# Altium PCB MainBoard.PcbDoc (part 1 of 2)
Units mm, origin at the board's own origin, x right, y up, seen from the top; angles counter-clockwise.
Board outline 48.44 x 52.94 mm, 4 copper layers (Component Side, Ground Plane, Power Plane, Solder Side), stack 0.844 mm thick; 73 components, 157 nets, 521 pads, 251 vias.
Unrouted connection lines stored in the file: 2.
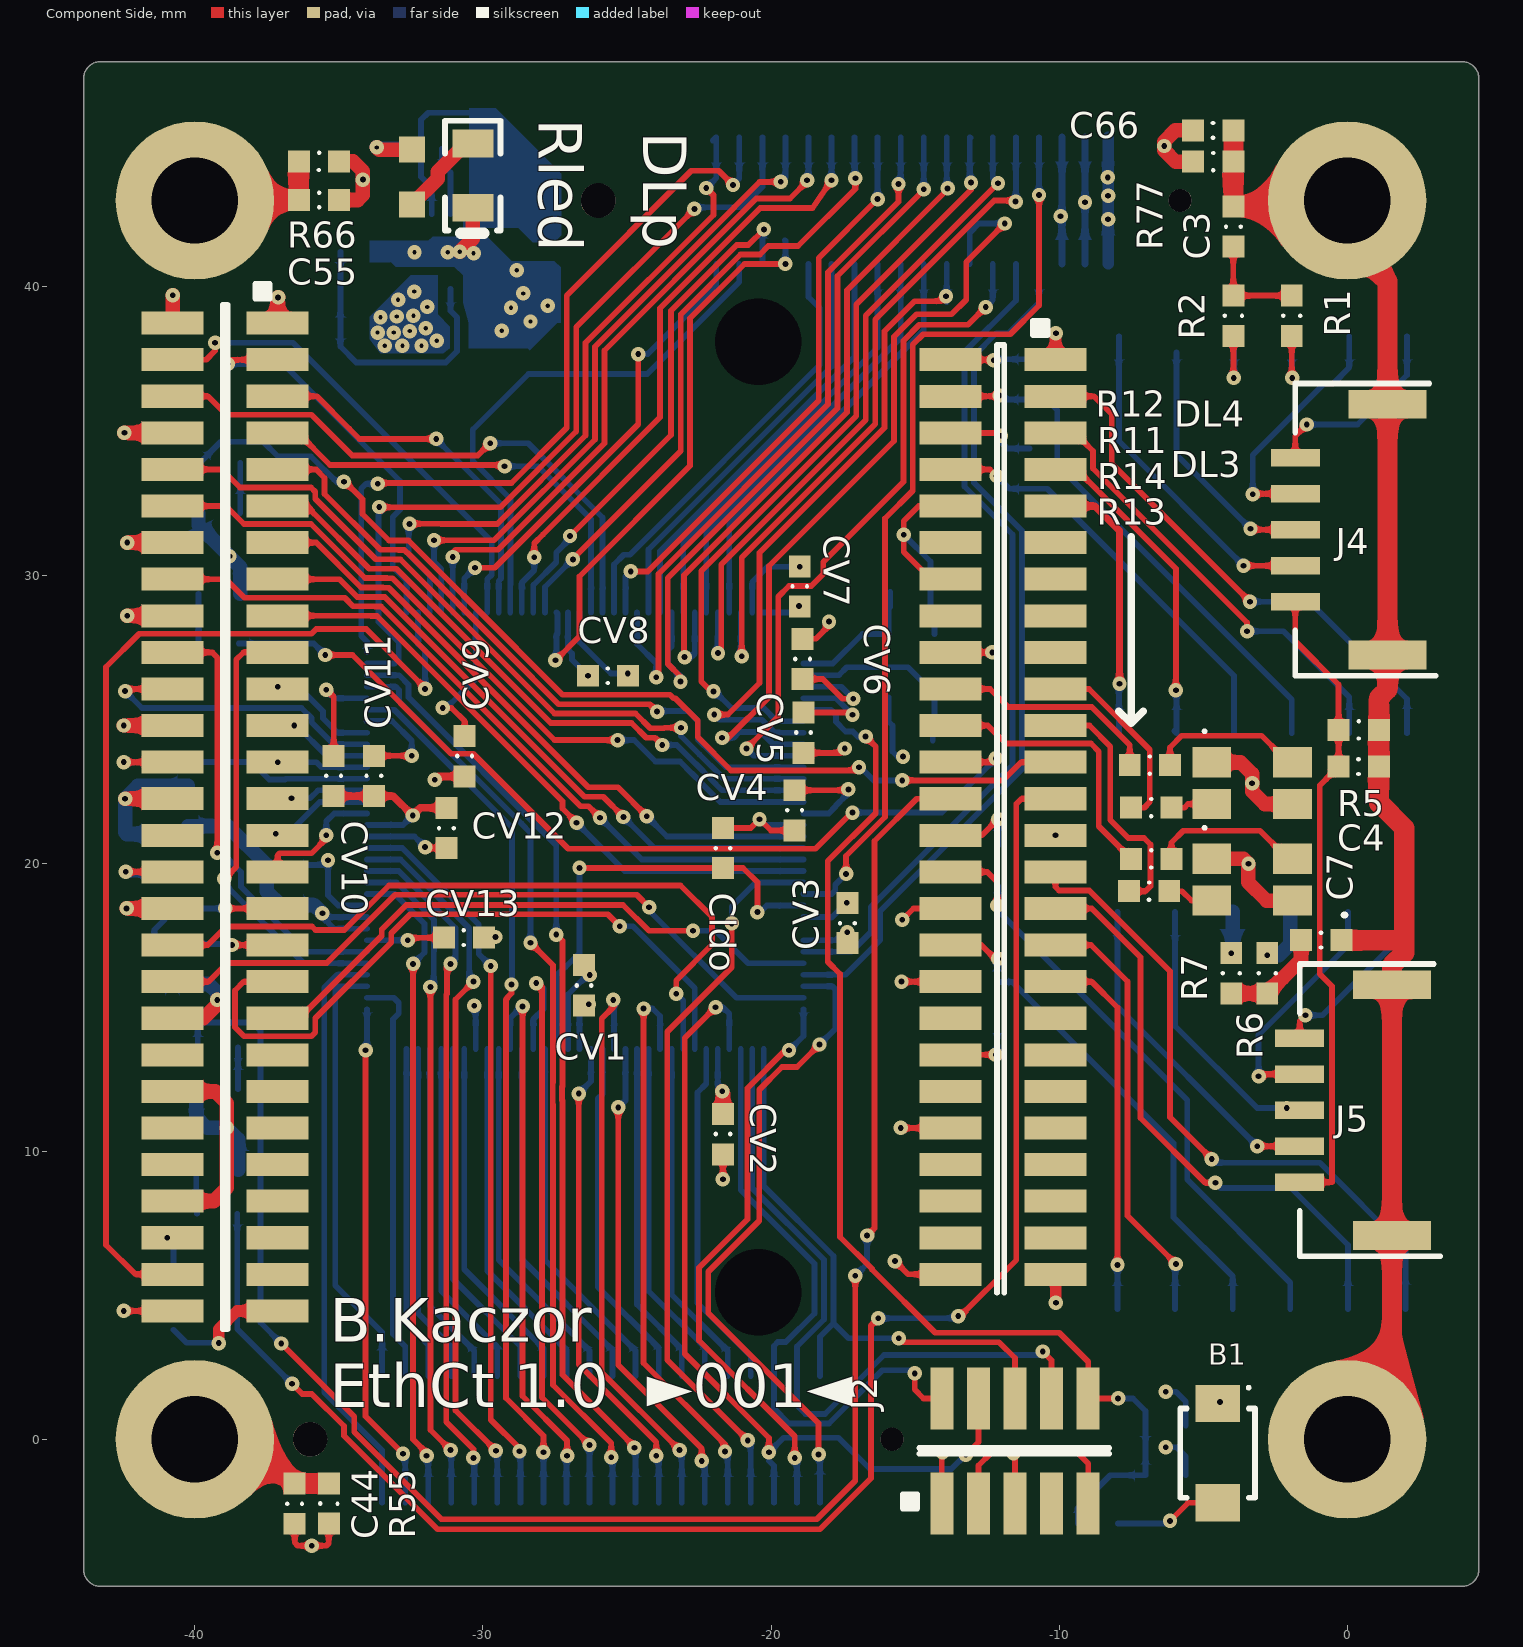
[diagram p0: Component Side view]
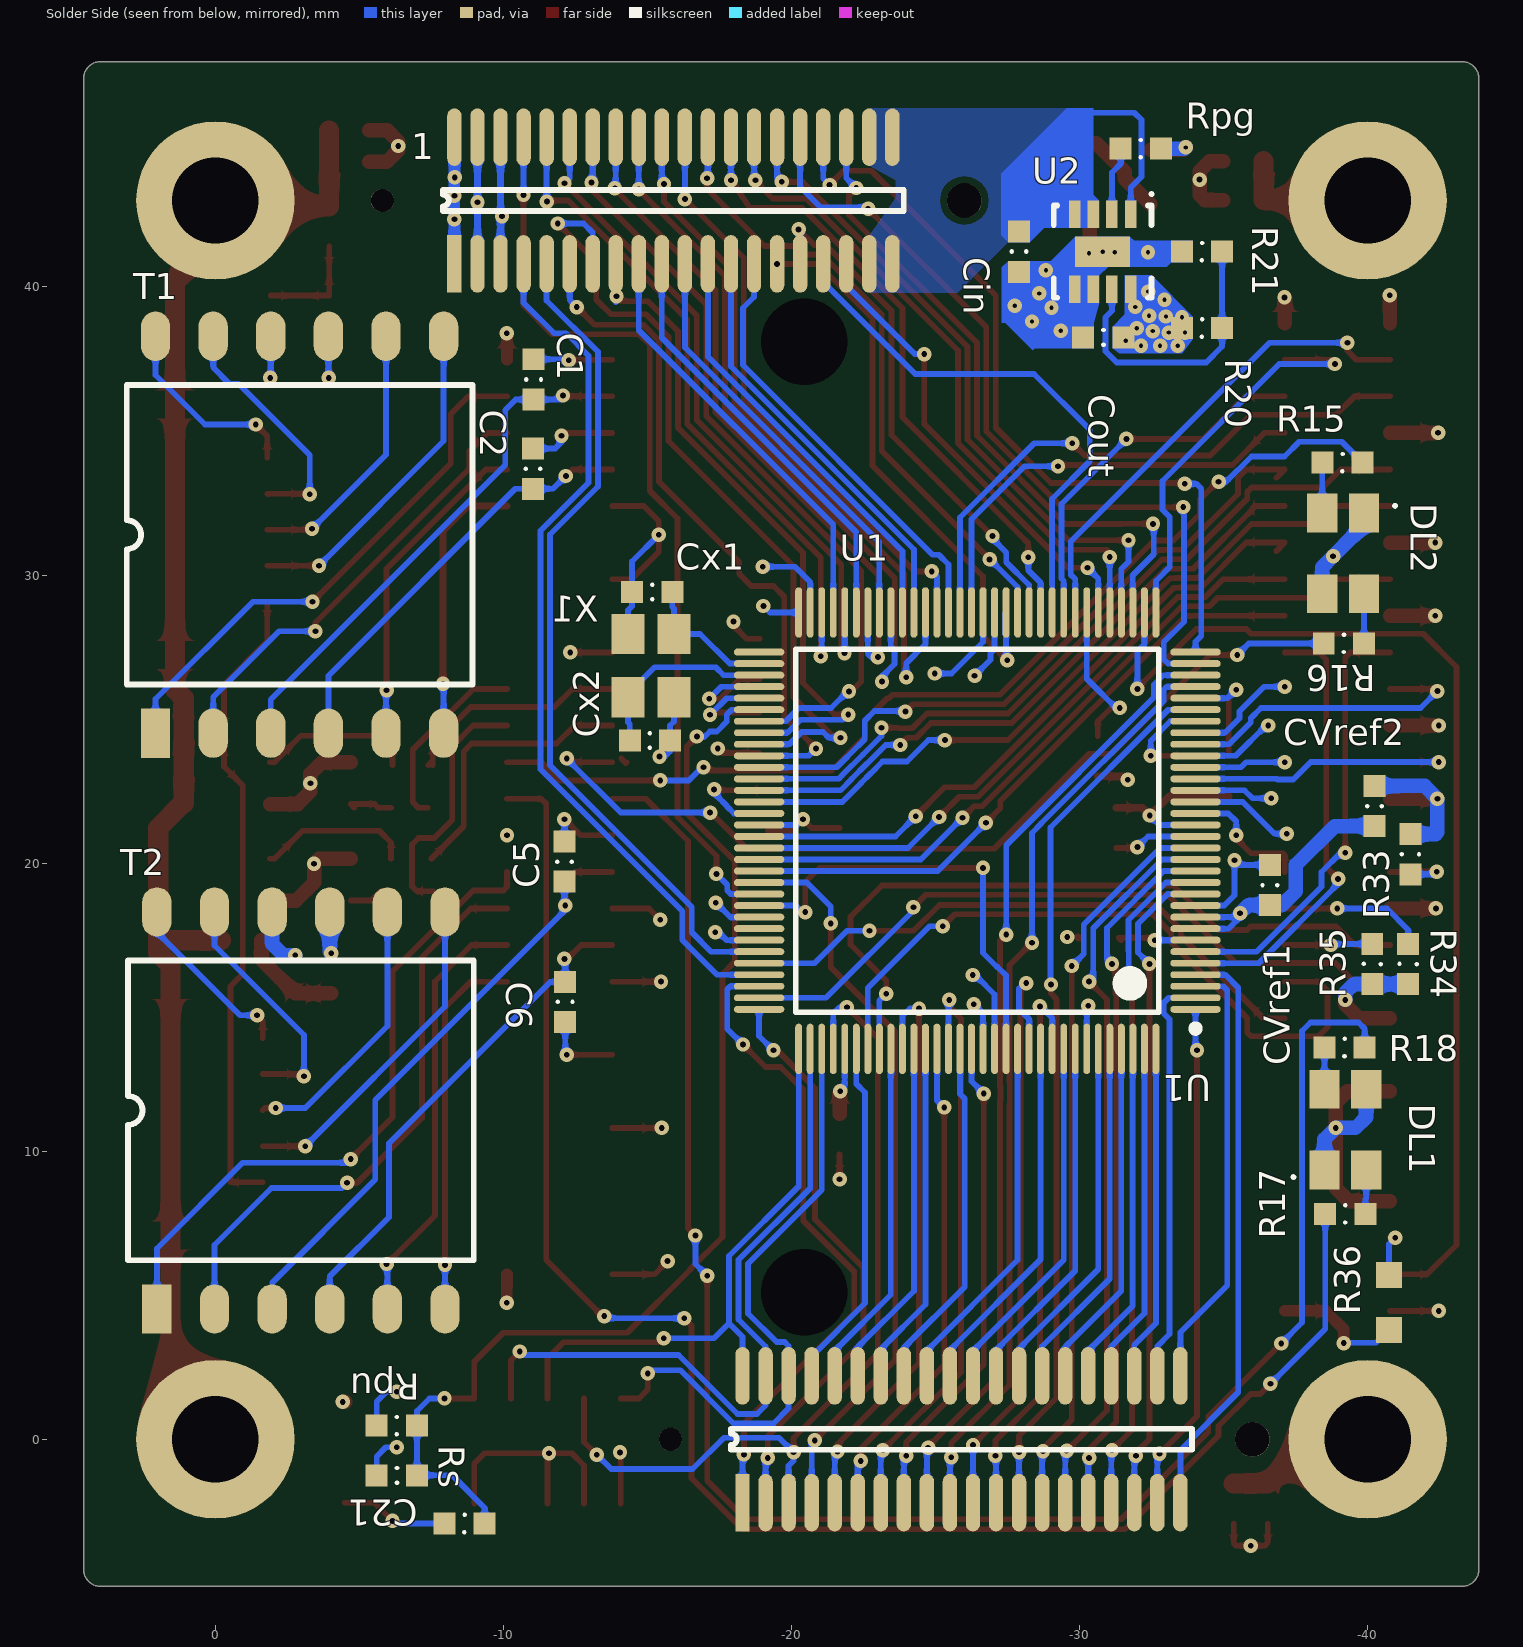
[diagram p1: Solder Side view, seen from below]
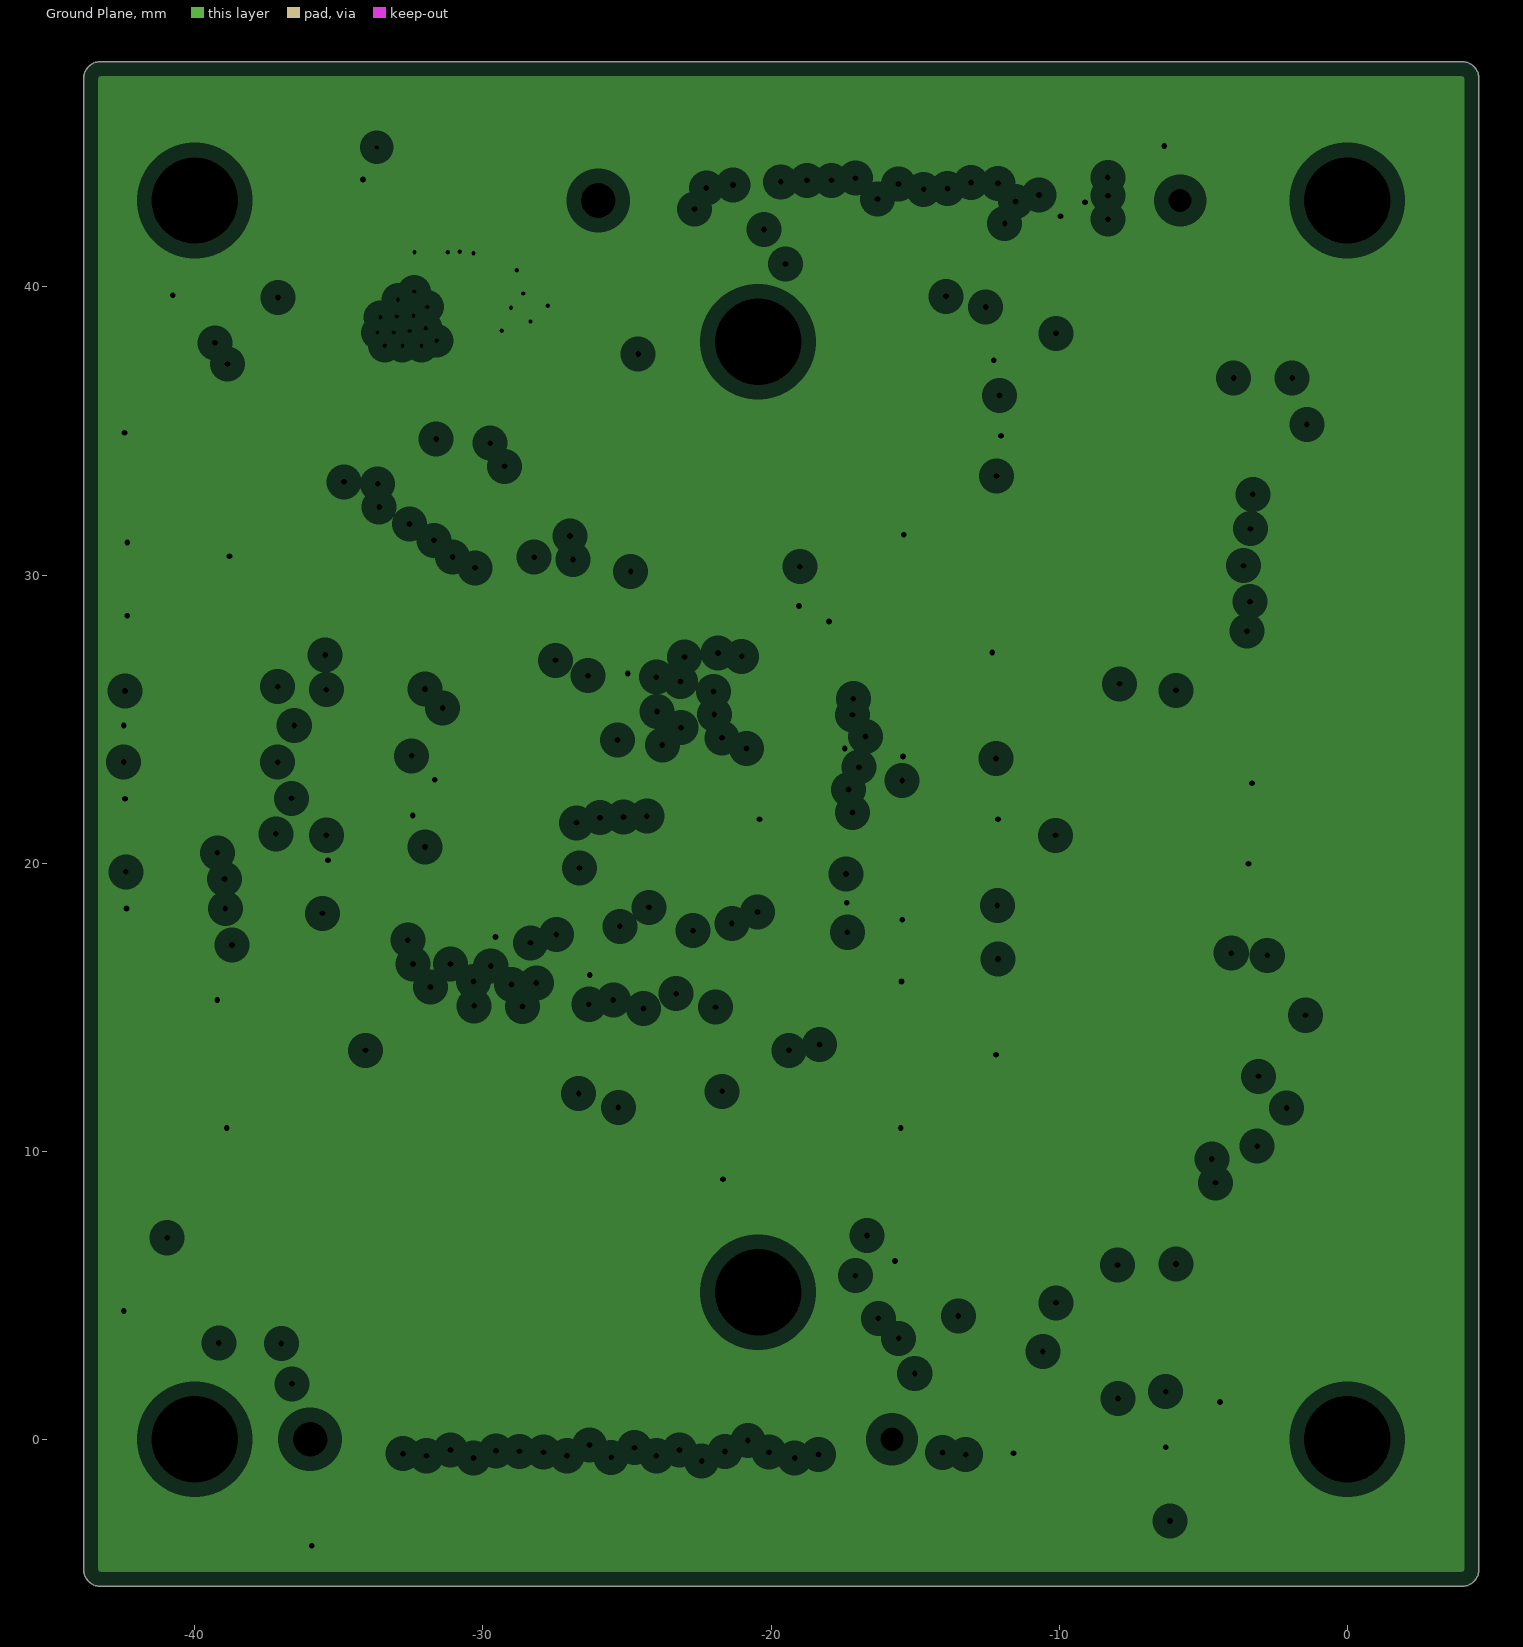
[diagram p2: Ground Plane, clearances drawn from the general rule]
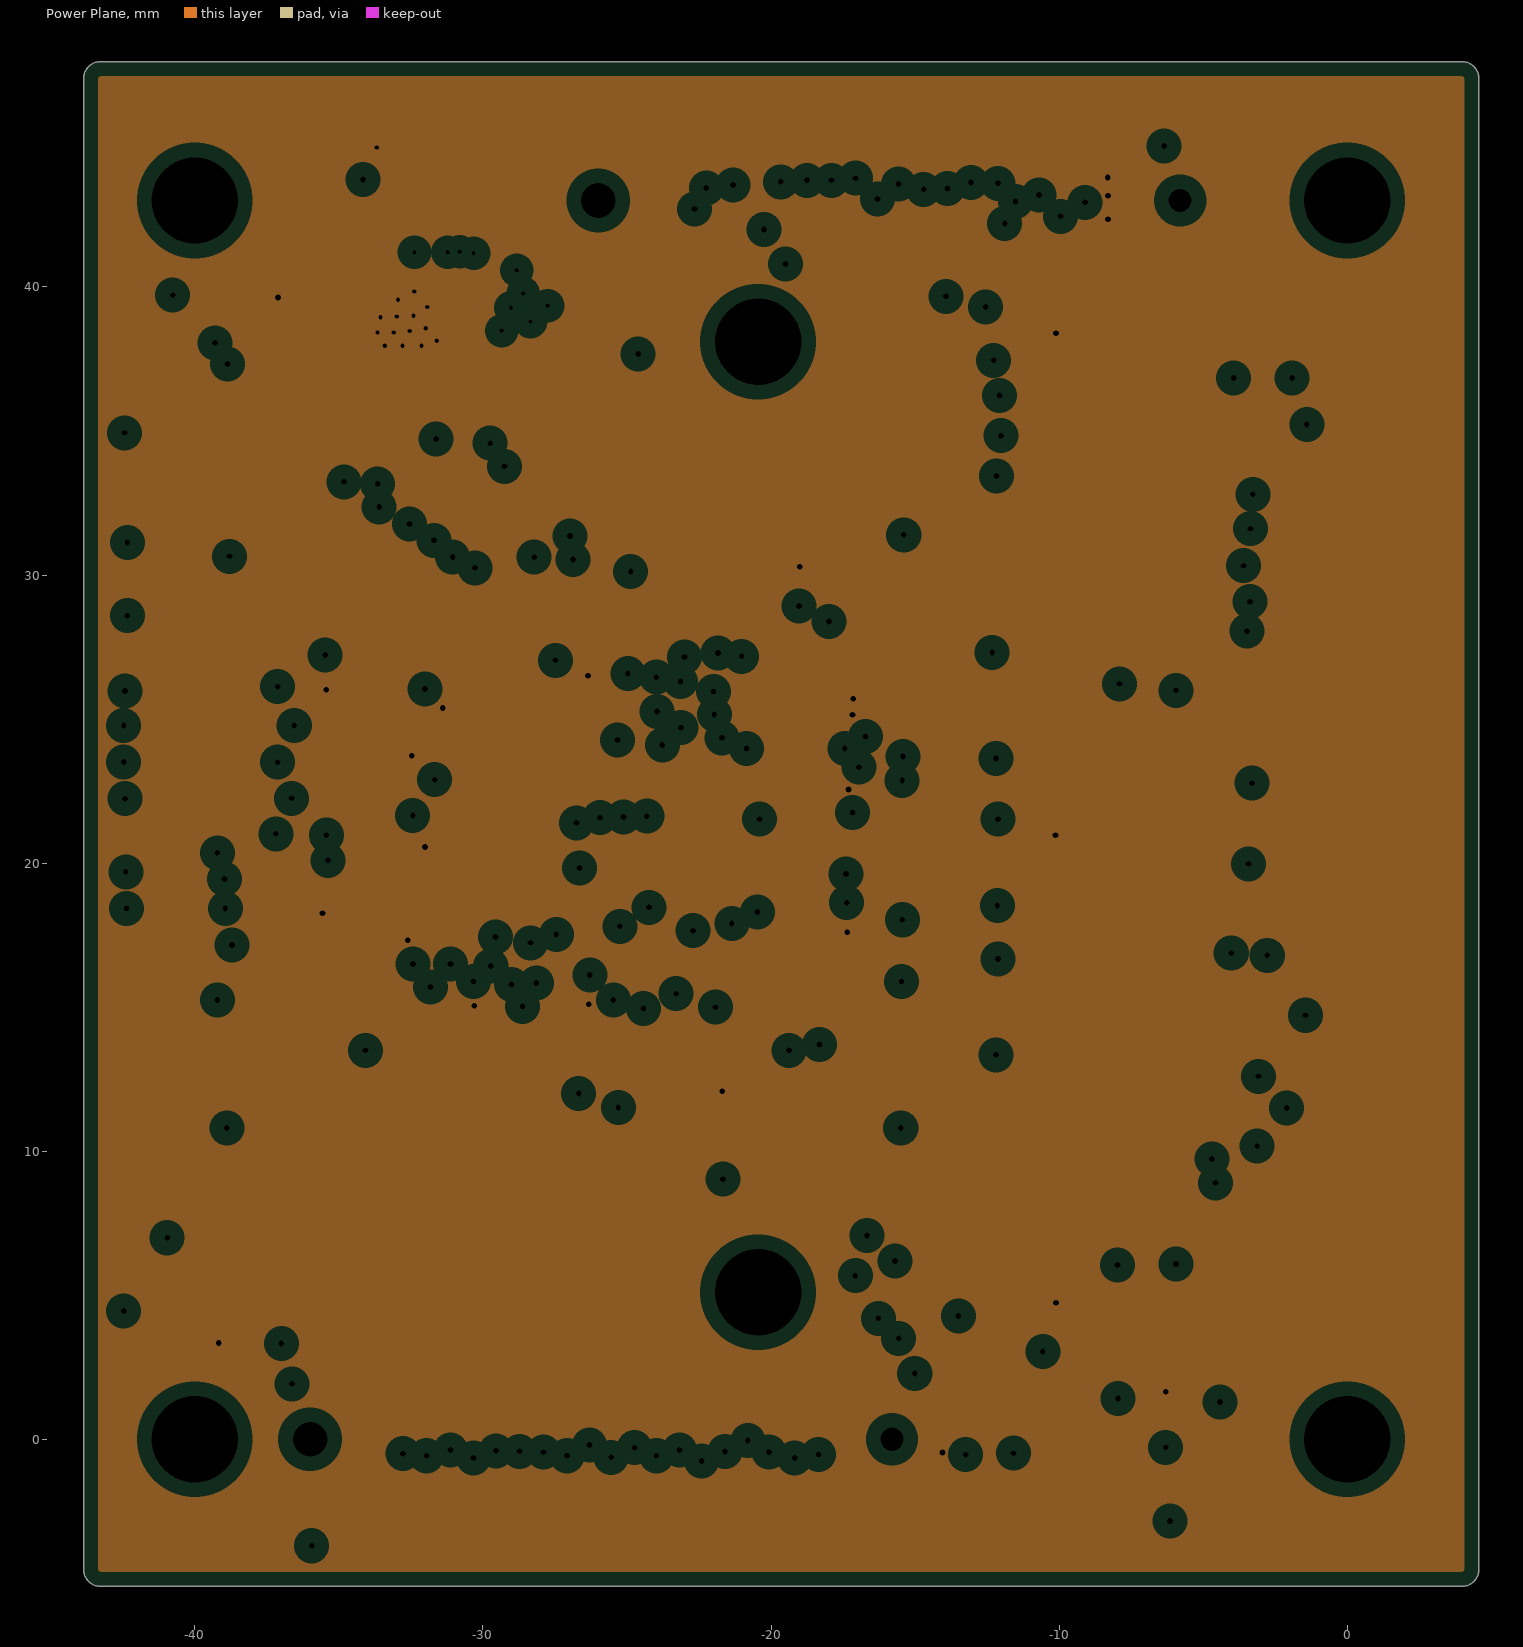
[diagram p3: Power Plane, clearances drawn from the general rule]

## Layer stack, top to bottom
Top Solder: solder mask 0.0102, Solder Resist, Dk 3.5
Component Side: signal copper 0.0356
Dielectric 1: core 0.32, FR-4, Dk 4.8
Ground Plane: plane copper 0.036, net GND
Dielectric 3: prepreg 0.127, Dk 4.2
Power Plane: plane copper 0.036, net 3V3
Dielectric 4: core 0.254, Dk 4.2
Solder Side: signal copper 0.0356
Bottom Solder: solder mask 0.0102, Solder Resist, Dk 3.5

## Board outline
-43.265,-5.11 cw(c-43.265,-4.51) -43.865,-4.51 -43.865,47.225 cw(c-43.265,47.225) -43.265,47.825 3.975,47.825 cw(c3.975,47.225) 4.575,47.225 4.575,-4.51 cw(c3.975,-4.51) 3.975,-5.11

## Design rules (kind name [scope] priority, off if disabled: settings)
BoardOutlineClearance [All] p1: gap=0.254
Clearance [All] p1: gap=0.127 except(0.229: Track-Via SMDPad-Via THPad-Via THPad-Fill THPad-Poly THPad-Region Via-Fill Via-Poly Via-Region; 0.254: Arc-Text Track-Text SMDPad-Text THPad-Text Via-Text Fill-Text Poly-Text Region-Text Text-Text; 0.305: THPad-THPad Via-Via)
HoleSize [All] p1: absolutevalues=TRUE maxlimit=5 minlimit=0.025 maxpercent=80.000 minpercent=20.000
MinimumSolderMaskSliver [All] p1: minsoldermaskwidth=0.076
PlaneClearance [All] p1: clearance=0.508
PlaneConnect [All] p1: planeconnectstyle=Direct reliefexpansion=0.508 reliefentries=4 reliefconductorwidth=0.254 reliefairgap=0.254
PolygonConnect [All] p1: connectstyle=Direct reliefconductorwidth=0.254 reliefentries=4 polygonreliefangle="90 Angle" airgapwidth=0.254
RoutingVias [All] p1: holewidth=0.2 width=0.5 viastyle="Through Hole" minholewidth=0.15 minwidth=0 maxholewidth=20 maxwidth=222
SMDEntry [All] p1: side=TRUE corner=TRUE anyangle=FALSE
SilkToBoardRegionClearance SilkToBoardRegionClearance_1 [All] p1:
SilkToSilkClearance [All] p1: silktosilkclearance=0.102
SilkToSolderMaskClearance [IsPad] p1: minsilkscreentomaskgap=0.102 clearancetoexposedcopper=TRUE
SolderMaskExpansion [Isvia] p1: expansion=0.07 soldermaskfromhole=TRUE
SolderMaskExpansion SolderMaskExpansionuSip8 [HasFootprint('uSIP-8')] p2: expansion=0.152
SolderMaskExpansion SolderMaskExpansion_1 [All] p3: expansion=0.102
Width [All] p1: maxlimit=1.27 minlimit=0.127 preferedwidth=0.254
23 further rules are at their usual default settings.

## Classes and differential pairs
component class Anybus-Base: R33 R34 R35 R36 U1
component class Connectors: 1 J2
component class Network: C1 C2 C3 C4 C5 C6 C7 DL1 DL2 DL3 DL4 J4 J5 R1 R2 R5 R6 R7 R11 R12 R13 R14 R15 R16 R17 R18 T1 T2 ""
component class PowerSupply: B1 C21 C44 C55 C66 Cin Cldo Cout CV1 CV2 CV3 CV4 CV5 CV6 CV7 CV8 CV9 CV10 CV11 CV12 CV13 CVref1 CVref2 Cx1 Cx2 DLp R20 R21 R55 R66 R77 Rled Rpg Rpu Rs U2 X1

## Components (designator, comment, footprint, x,y, rotation, side; value= is the part's Value field where it differs from the comment)
1 "TE-Fine-Stack-40-S_eth" TE-FINE-STACK-40-S-ETH -36,0 r90 bottom
B1 "B_TACTD37" _B_TACT30 -4.496,-0.483 r270 top
C1 "100n" "0603 HighDensity" -11.052,36.791 r90 bottom
C2 "100n" "0603 HighDensity" -11.027,33.692 r90 bottom
C3 "1n" "0603 HighDensity" -3.951,42.1 r90 top
C4 "1n" "0603 HighDensity" 0.4,23.35 r0 top
C5 "100n" "0603 HighDensity" -12.119,20.053 r90 bottom
C6 "100n" "0603 HighDensity" -12.144,15.176 r270 bottom
C7 "1n" "0603 HighDensity" -0.9,17.325 r0 top
C21 "10n" "0603 HighDensity" -6.3,-1.25 r0 bottom
C44 "1n" "0603 HighDensity" -36.535,-2.233 r90 top
C55 "1n" "0603 HighDensity" -35.692,43.015 r180 top
C66 "1n" "0603 HighDensity" -4.65,45.436 r0 top
Cin "10n" "0603 HighDensity" -27.9,41.225 r270 bottom
Cldo "10n" "0603 HighDensity" -21.666,20.523 r90 top
Cout "22u" "0603 HighDensity" -30.825,38.25 r0 bottom
CV1 "100n" "0603 HighDensity" -26.495,15.76 r90 top
CV2 "100n" "0603 HighDensity" -21.669,10.591 r270 top
CV3 "100n" "0603 HighDensity" -17.351,17.919 r90 top
CV4 "100n" "0603 HighDensity" -19.18,21.831 r270 top
CV5 "100n" "0603 HighDensity" -18.875,24.525 r270 top
CV6 "100n" "0603 HighDensity" -18.901,27.088 r90 top
CV7 "100n" "0603 HighDensity" -19.002,29.603 r270 top
CV8 "100n" "0603 HighDensity" -25.657,26.504 r0 top
CV9 "100n" "0603 HighDensity" -30.635,23.71 r270 top
CV10 "100n" "0603 HighDensity" -35.182,23.024 r270 top
CV11 "100n" "0603 HighDensity" -33.785,23.024 r270 top
CV12 "100n" "0603 HighDensity" -31.27,21.221 r90 top
CV13 "100n" "0603 HighDensity" -30.661,17.411 r0 top
CVref1 "100n" "0603 HighDensity" -36.604,19.24 r90 bottom
CVref2 "100n" "0603 HighDensity" -40.237,21.983 r90 bottom
Cx1 "100n" "0603 HighDensity" -15.088,24.257 r180 bottom
Cx2 "100n" "0603 HighDensity" -15.164,29.413 r0 bottom
DL1 "LED2" "2D-  3528, PLCC4" -39.225,10.751 r90 bottom
DL2 "LED2" "2D-  3528, PLCC4" -39.15,30.75 r270 bottom
DL3 "LED2" "2D-  3528, PLCC4" -3.3,19.425 r0 top
DL4 "LED2" "2D-  3528, PLCC4" -3.3,22.775 r0 top
DLp "RED" 0805_LED -30.353,43.866 r90 top
J2 "Pin 2.00mm" "GOLDPIN 1.27MM SOCKET 2X5 SMD" -11.532,-0.406 r90 top
J4 "Click_Mate 5x1" "CLIK-Mate 5x1" -1.8,29.075 r270 top
J5 "Click_Mate 5x1" "CLIK-Mate 5x1" -1.648,8.925 r270 top
R1 "75" "0603_R HighDensity" -1.925,39 r270 top
R2 "75" "0603_R HighDensity" -3.95,39 r270 top
R5 "1M" "0603_R HighDensity" 0.4,24.625 r180 top
R6 "75" "0603_R HighDensity" -2.775,16.175 r90 top
R7 "75" "0603_R HighDensity" -4.025,16.175 r90 top
R11 "220" "0603_R HIGHDENSITY" -6.8,21.925 r180 top
R12 "220" "0603_R HIGHDENSITY" -6.85,23.4 r180 top
R13 "220" "0603_R HIGHDENSITY" -6.875,19.025 r180 top
R14 "220" "0603_R HIGHDENSITY" -6.8,20.15 r180 top
R15 "220" "0603_R HIGHDENSITY" -39.125,33.9 r180 bottom
R16 "220" "0603_R HIGHDENSITY" -39.175,27.625 r0 bottom
R17 "220" "0603_R HIGHDENSITY" -39.225,7.825 r0 bottom
R18 "220" "0603_R HIGHDENSITY" -39.2,13.6 r180 bottom
R20 "510k" "0603_R HighDensity" -34.25,38.575 r0 bottom
R21 "162k" "0603_R HighDensity" -34.25,41.225 r180 bottom
R33 "10k" "0603_R HighDensity" -41.481,20.307 r270 bottom
R34 "10k" "0603_R HighDensity" -41.405,16.497 r90 bottom
R35 "10k" "0603_R HighDensity" -40.16,16.497 r90 bottom
R36 "10k" RES0603_M -40.742,4.75 r270 bottom
R55 "500k" "0603_R HighDensity" -35.35,-2.233 r270 top
R66 "500k" "0603_R HighDensity" -35.692,44.36 r0 top
R77 "500k" "0603_R HighDensity" -4.65,44.35 r180 top
Rled "100" RES0603_M -32.461,43.815 r90 top
Rpg "499k" "0603_R HighDensity" -32.125,44.8 r180 bottom
Rpu "10k" "0603_R HighDensity" -6.3,0.475 r0 bottom
Rs "470" "0603_R HighDensity" -8.65,-2.925 r180 bottom
T1 "47uH" H1112 2.075,24.509 r90 bottom
T2 "47uH" H1112 2.027,4.525 r90 bottom
U1 "TM4C1292NCPDTI3R" PDT0128A_N -26.45,21.125 r0 bottom
U2 "TPS82085" uSIP-8 -30.8,41.225 r270 bottom
X1 "25MHz" _X_CFPX180 -14.326,25.756 r90 bottom
? "Anybus_CC_B40" Anybus-CC-B40 -25.45,21.6 r0 top

## Footprints (in the part's own frame and the unit in brackets; to place one, negate y for a bottom-side part, rotate by r counter-clockwise, add the part's x,y. Pads: shape width x height; smd on the part's side, far side on the other; paste and mask are expansions set on the pad)
"2D-  3528, PLCC4" [mm] "DFN, 4-Leads, Body 2,80x3,25mm, Pitch 2,80mm, IPC Medium Density"
  rect 1.35x1.05 smd: 1(-1.4,0.725) 2(-1.4,-0.725) 3(1.4,-0.725) 4(1.4,0.725)
  silkscreen extent -1.7,1.75 -1.6,1.85, body extent -1.65,-1.4 1.65,1.4, height 1.9
"0603 HighDensity" [mil]
  rect 30x30 smd: 1(-27.5,0) 2(27.5,0)
  silkscreen extent -1,-10 0,10, body extent -31,-16 31,16, height 31
"0603_R HighDensity" [mil]
  rect 30x30 smd: 1(-27.5,0) 2(27.5,0)
  silkscreen extent 0,-12 0,12, body extent -31,-16 31,16, height 31
"0603_R HIGHDENSITY" [mil]
  rect 30x30 smd: 1(-27.5,0) 2(27.5,0)
  silkscreen extent 0,-12 0,12, body extent -31,-16 31,16, height 31
0805_LED [mm]
  rect 0.965x1.422 smd: A(1.118,0) K(-1.118,0)
  silkscreen extent -2,-0.97 1.91,0.97, body extent -1,-0.63 1,0.63, height 0.9
_B_TACT30 [mm] "Tactile switch 1.2x3x2.5mm"
  rect 1.3x1.55 smd: 1(-1.725,0) 2(1.725,0)
  silkscreen extent -2.32,-1.3 1.55,1.3, body extent -1.55,-1.3 1.55,1.3, height 1.75
_X_CFPX180 [mm] "XTAL Q0M032D7-TXC Maritex"
  rect 1.4x1.15 smd: 1(0,0) 2(2.2,0) 3(2.2,-1.6) 4(0,-1.6)
Anybus-CC-B40 [mm]
  round 1.524 hole 3 unplated: 1(5,-16.5) 1(5,16.5)
  rect 2.15x0.8 smd: 1(15.325,15.874) 2(11.675,15.874) 3(15.325,14.604) 4(11.675,14.604) 5(15.325,13.334) 6(11.675,13.334) 7(15.325,12.064) 8(11.675,12.064) 9(15.325,10.794) 10(11.675,10.794) 11(15.325,9.524) 12(11.675,9.524) 13(15.325,8.254) 14(11.675,8.254) 15(15.325,6.984) 16(11.675,6.984) 17(15.325,5.714) 18(11.675,5.714) 19(15.325,4.444) 20(11.675,4.444) 21(15.325,3.174) 22(11.675,3.174) 23(15.325,1.904) 24(11.675,1.904) 25(15.325,0.634) 26(11.675,0.634) 27(15.325,-0.636) 28(11.675,-0.636) 29(15.325,-1.906) 30(11.675,-1.906) 31(15.325,-3.176) 32(11.675,-3.176) 33(15.325,-4.446) 34(11.675,-4.446) 35(15.325,-5.716) 36(11.675,-5.716) 37(15.325,-6.986) 38(11.675,-6.986) 39(15.325,-8.256) 40(11.675,-8.256) 41(15.325,-9.526) 42(11.675,-9.526) 43(15.325,-10.796) 44(11.675,-10.796) 45(15.325,-12.066) 46(11.675,-12.066) 47(15.325,-13.336) 48(11.675,-13.336) 49(15.325,-14.606) 50(11.675,-14.606) 51(15.325,-15.876) 52(11.675,-15.876) 101(-11.675,17.145) 102(-15.325,17.145) 103(-11.675,15.875) 104(-15.325,15.875) 105(-11.675,14.605) 106(-15.325,14.605) 107(-11.675,13.335) 108(-15.325,13.335) 109(-11.675,12.065) 110(-15.325,12.065) 111(-11.675,10.795) 112(-15.325,10.795) 113(-11.675,9.525) 114(-15.325,9.525) 115(-11.675,8.255) 116(-15.325,8.255) 117(-11.675,6.985) 118(-15.325,6.985) 119(-11.675,5.715) 120(-15.325,5.715) 121(-11.675,4.445) 122(-15.325,4.445) 123(-11.675,3.175) 124(-15.325,3.175) 125(-11.675,1.905) 126(-15.325,1.905) 127(-11.675,0.635) 128(-15.325,0.635) 129(-11.675,-0.635) 130(-15.325,-0.635) 131(-11.675,-1.905) 132(-15.325,-1.905) 133(-11.675,-3.175) 134(-15.325,-3.175) 135(-11.675,-4.445) 136(-15.325,-4.445) 137(-11.675,-5.715) 138(-15.325,-5.715) 139(-11.675,-6.985) 140(-15.325,-6.985) 141(-11.675,-8.255) 142(-15.325,-8.255) 143(-11.675,-9.525) 144(-15.325,-9.525) 145(-11.675,-10.795) 146(-15.325,-10.795) 147(-11.675,-12.065) 148(-15.325,-12.065) 149(-11.675,-13.335) 150(-15.325,-13.335) 151(-11.675,-14.605) 152(-15.325,-14.605) 153(-11.675,-15.875) 154(-15.325,-15.875) 155(-11.675,-17.145) 156(-15.325,-17.145)
  silkscreen extent -13.58,-17.78 15.05,18.5, body extent -15.05,-17.3 15.05,17.3, height 4.4
"CLIK-Mate 5x1" [mm]
  rect 0.6x1.7 smd: 0(-5,0) 1(-3.75,0) 2(-2.5,0) 3(-1.25,0) 4(0,0)
  rect 1x2.7 smd: 5(-6.85,3.2) 6(1.85,3.2)
  silkscreen extent -7.57,0 2.58,4.87, body extent -7.28,-0.65 2.32,4.35, height 5.53
"GOLDPIN 1.27MM SOCKET 2X5 SMD" [mm]
  rect 2.15x0.8 smd: 1(-1.825,2.54) 2(-1.825,1.27) 3(-1.825,0) 4(-1.825,-1.27) 5(-1.825,-2.54) 6(1.825,-2.54) 7(1.825,-1.27) 8(1.825,0) 9(1.825,1.27) 10(1.825,2.54)
  silkscreen extent -2,-3.28 0.1,3.9, body extent -1.55,-2.68 1.55,2.7, height 4.4
H1112 [mm]
  rect 1.71x1.02 smd: 1(0,0)
  oval 1.71x1.02 smd: 2(0,-2) 3(0,-4) 4(0,-6) 5(0,-8) 6(0,-10) 7(13.78,-10) 8(13.78,-8) 9(13.78,-6) 10(13.78,-4) 11(13.78,-2) 12(13.78,0)
  silkscreen extent 1.69,-11 12.09,1, body extent 0.4,-11 13.4,1, height 4.88
PDT0128A_N [mm]
  oval 1.75x0.24 smd paste-0.102 mask+0.102: 1(-7.575,6.2) 2(-7.575,5.8) 3(-7.575,5.4) 4(-7.575,5) 5(-7.575,4.6) 6(-7.575,4.2) 7(-7.575,3.8) 8(-7.575,3.4) 9(-7.575,3) 10(-7.575,2.6) 11(-7.575,2.2) 12(-7.575,1.8) 13(-7.575,1.4) 14(-7.575,1) 15(-7.575,0.6) 16(-7.575,0.2) 17(-7.575,-0.2) 18(-7.575,-0.6) 19(-7.575,-1) 20(-7.575,-1.4) 21(-7.575,-1.8) 22(-7.575,-2.2) 23(-7.575,-2.6) 24(-7.575,-3) 25(-7.575,-3.4) 26(-7.575,-3.8) 27(-7.575,-4.2) 28(-7.575,-4.6) 29(-7.575,-5) 30(-7.575,-5.4) 31(-7.575,-5.8) 32(-7.575,-6.2) 65(7.575,-6.2) 66(7.575,-5.8) 67(7.575,-5.4) 68(7.575,-5) 69(7.575,-4.6) 70(7.575,-4.2) 71(7.575,-3.8) 72(7.575,-3.4) 73(7.575,-3) 74(7.575,-2.6) 75(7.575,-2.2) 76(7.575,-1.8) 77(7.575,-1.4) 78(7.575,-1) 79(7.575,-0.6) 80(7.575,-0.2) 81(7.575,0.2) 82(7.575,0.6) 83(7.575,1) 84(7.575,1.4) 85(7.575,1.8) 86(7.575,2.2) 87(7.575,2.6) 88(7.575,3) 89(7.575,3.4) 90(7.575,3.8) 91(7.575,4.2) 92(7.575,4.6) 93(7.575,5) 94(7.575,5.4) 95(7.575,5.8) 96(7.575,6.2)
  oval 0.24x1.75 smd paste-0.102 mask+0.102: 33(-6.2,-7.575) 34(-5.8,-7.575) 35(-5.4,-7.575) 36(-5,-7.575) 37(-4.6,-7.575) 38(-4.2,-7.575) 39(-3.8,-7.575) 40(-3.4,-7.575) 41(-3,-7.575) 42(-2.6,-7.575) 43(-2.2,-7.575) 44(-1.8,-7.575) 45(-1.4,-7.575) 46(-1,-7.575) 47(-0.6,-7.575) 48(-0.2,-7.575) 49(0.2,-7.575) 50(0.6,-7.575) 51(1,-7.575) 52(1.4,-7.575) 53(1.8,-7.575) 54(2.2,-7.575) 55(2.6,-7.575) 56(3,-7.575) 57(3.4,-7.575) 58(3.8,-7.575) 59(4.2,-7.575) 60(4.6,-7.575) 61(5,-7.575) 62(5.4,-7.575) 63(5.8,-7.575) 64(6.2,-7.575) 97(6.2,7.575) 98(5.8,7.575) 99(5.4,7.575) 100(5,7.575) 101(4.6,7.575) 102(4.2,7.575) 103(3.8,7.575) 104(3.4,7.575) 105(3,7.575) 106(2.6,7.575) 107(2.2,7.575) 108(1.8,7.575) 109(1.4,7.575) 110(1,7.575) 111(0.6,7.575) 112(0.2,7.575) 113(-0.2,7.575) 114(-0.6,7.575) 115(-1,7.575) 116(-1.4,7.575) 117(-1.8,7.575) 118(-2.2,7.575) 119(-2.6,7.575) 120(-3,7.575) 121(-3.4,7.575) 122(-3.8,7.575) 123(-4.2,7.575) 124(-4.6,7.575) 125(-5,7.575) 126(-5.4,7.575) 127(-5.8,7.575) 128(-6.2,7.575)
  silkscreen extent -7.7,-6.3 6.3,6.99
RES0603_M [mm]
  rect 0.9x0.9 smd: 1(-0.95,0) 2(0.95,0)
  body extent -0.82,-0.48 0.82,0.48, height 0.5
TE-FINE-STACK-40-S-ETH [mm]
  rect 2x0.5 smd: 1(-2.2,17.7) 41(40.8,27.7)
  oval 2x0.5 smd: 2(-2.2,16.9) 3(-2.2,16.1) 4(-2.2,15.3) 5(-2.2,14.5) 6(-2.2,13.7) 7(-2.2,12.9) 8(-2.2,12.1) 9(-2.2,11.3) 10(-2.2,10.5) 11(-2.2,9.7) 12(-2.2,8.9) 13(-2.2,8.1) 14(-2.2,7.3) 15(-2.2,6.5) 16(-2.2,5.7) 17(-2.2,4.9) 18(-2.2,4.1) 19(-2.2,3.3) 20(-2.2,2.5) 21(2.2,2.5) 22(2.2,3.3) 23(2.2,4.1) 24(2.2,4.9) 25(2.2,5.7) 26(2.2,6.5) 27(2.2,7.3) 28(2.2,8.1) 29(2.2,8.9) 30(2.2,9.7) 31(2.2,10.5) 32(2.2,11.3) 33(2.2,12.1) 34(2.2,12.9) 35(2.2,13.7) 36(2.2,14.5) 37(2.2,15.3) 38(2.2,16.1) 39(2.2,16.9) 40(2.2,17.7) 42(40.8,26.9) 43(40.8,26.1) 44(40.8,25.3) 45(40.8,24.5) 46(40.8,23.7) 47(40.8,22.9) 48(40.8,22.1) 49(40.8,21.3) 50(40.8,20.5) 51(40.8,19.7) 52(40.8,18.9) 53(40.8,18.1) 54(40.8,17.3) 55(40.8,16.5) 56(40.8,15.7) 57(40.8,14.9) 58(40.8,14.1) 59(40.8,13.3) 60(40.8,12.5) 61(45.2,12.5) 62(45.2,13.3) 63(45.2,14.1) 64(45.2,14.9) 65(45.2,15.7) 66(45.2,16.5) 67(45.2,17.3) 68(45.2,18.1) 69(45.2,18.9) 70(45.2,19.7) 71(45.2,20.5) 72(45.2,21.3) 73(45.2,22.1) 74(45.2,22.9) 75(45.2,23.7) 76(45.2,24.5) 77(45.2,25.3) 78(45.2,26.1) 79(45.2,26.9) 80(45.2,27.7)
  round 0.8 hole 0.8 unplated: 90(0,20.2) 93(43,30.2)
  round 1.2 hole 1.2 unplated: 91(0,0) 92(43,10)
  silkscreen extent -0.37,2.1 43.36,28.1, body extent -3,-0.8 46,31, height 4.6
uSIP-8 [mm] "SON, 8-Leads, Body 3,00x2,80mm, Pitch 0,65mm, Thermal Pad 1,90x1,05mm, IPC Medium Density"
  rect 0.95x0.4 smd: 1(-1.3,0.975) 2(-1.3,0.325) 3(-1.3,-0.325) 4(-1.3,-0.975) 5(1.3,-0.975) 6(1.3,-0.325) 7(1.3,0.325) 8(1.3,0.975)
  rect 1.05x1.9 smd: 9(0,0)
  silkscreen extent -2.05,-1.7 1.6,1.75, body extent -1.45,-1.55 1.45,1.55, height 1.33

## Part data
B1: "Tactile Switch 50mA/12VDC 6.1x3.7mm"
C1 C2 C3 C4 C5 C6 C7 C21 C44 C55 C66 Cin Cldo Cout CV1 CV2 CV3 CV4 CV5 CV6 CV7 CV8 CV9 CV10 CV11 CV12 CV13 CVref1 CVref2 Cx1 Cx2: library part C_CER, "Ceramic Capacitor"
DL1 DL2 DL3 DL4: "Light Emitting Diode - Double"
DLp: library part LED1, "Light Emitting Diode"
J2: library part "Goldpin 1.27 socket 2x5"
R1 R2 R5 R6 R7 R11 R12 R13 R14 R15 R16 R17 R18 R20 R21 R33 R34 R35 R36 R55 R66 R77 Rled Rpg Rpu Rs: library part R, "Resistor"
T1 T2: library part H1112-NL-TRANSFORMER, "Power Inductor"
U1: "Imported"
U2: "3-A, 0.8-6-V, Step-Down DC/DC Converter"
X1: library part CFPX180, "Crystal Oscillator"

## Free pads (board coordinates)
  round 5.5 hole 3: 2(-40,43) 3(-40,0) 4(0,0) 5(0,43)

## Via types
v1: diameter 0.5, hole 0.2, Component Side to Solder Side, 226 vias
v2: diameter 0.5, hole 0.15, Component Side to Solder Side, 25 vias

## Nets (pads, with @x,y where several pads share a name; then routed paths per layer and width w, separated by ;. In a path a pad name is that pad's centre, name@x,y a point inside that pad or via, vN(x,y) a via of type N, cw(c..) or ccw(c..) an arc to the next point about the centre after c; other vN are vias at no path point)
3V3: 1.41 1.80 ?.1@-10.125,37.474 ?.27 ?.51 ?.101 ?.155 Cout.1 CV1.1 CV2.1 CV3.1 CV4.1 CV5.1 CV6.1 CV7.1 CV8.1 CV9.1 CV10.1 CV11.1 CV12.1 CV13.1 CVref1.1 CVref2.1 J2.1 R20.2 R36.2 Rled.2 Rpg.2 Rpu.2 U1.7 U1.8 U1.9 U1.16 U1.26 U1.28 U1.39 U1.47 U1.63 U1.68 U1.69 U1.79 U1.90 U1.101 U1.113 U1.122 U2.8 | length 70.1
  Component Side w0.2: v1(-35.436,26.022) -35.182,25.768 CV10.1@-35.182,23.723 ; CV11.1@-33.783,23.725 CV11.1@-33.785,23.723 -32.477,23.723 v1(-32.475,23.725) ; v1(-32.607,17.325) -32.521,17.411 CV13.1@-31.359,17.411 CV13.1@-31.445,17.325 ; v1(-32.007,20.557) -31.973,20.522 CV12.1@-31.27,20.522 ; v1(-31.397,25.387) -31.093,25.387 -30.635,24.929 CV9.1@-30.635,24.409 ; CV4.1@-19.18,22.529 -17.343,22.529 v1(-17.313,22.559) ; CV6.1@-18.901,26.39 -18.202,26.39 -17.517,25.705 v1(-17.145,25.705) ; CV5.1@-18.875,25.223 -17.248,25.223 v1(-17.17,25.146) ; J2.1@-14.072,-2.231 -14.072,-0.483 v1(-14.046,-0.457)
  Component Side w0.4: v1(-39.17,3.339) -39.17,3.822 -38.537,4.455 ?.155@-37.125,4.455 ; ?.51@-10.125,5.724 -10.125,5.324 -10.112,5.311 v1(-10.112,4.736) ; ?.1@-10.125,37.474 -10.125,38.379 v1(-10.112,38.391)
  Component Side w0.5: ?.101@-37.125,38.745 -37.125,39.624 v1(-37.112,39.636) ; v2(-33.683,44.843) -33.605,44.765 Rled.2@-32.461,44.765 ; v1(-21.695,12.077) -21.669,12.052 CV2.1@-21.669,11.29
  Solder Side w0.2: R36.2@-40.742,3.8 -40.292,3.35 -39.18,3.35 v1(-39.17,3.339) ; v1@-35.608,18.16 -35.173,17.725 U1.8@-34.025,17.725 ; v1(-35.571,18.256) -35.441,18.125 U1.9@-34.025,18.125 ; v1(-35.436,26.022) -35.139,25.725 U1.28@-34.025,25.725 ; U1.26@-34.039,24.929 -33.154,24.929 -32.475,24.25 v1(-32.475,23.725) ; U1.7@-34.025,17.325 v1(-32.607,17.325) ; U1.16@-34.025,20.925 -32.375,20.925 v1(-32.007,20.557) ; v1(-31.397,25.387) -31.397,25.305 -31.372,25.28 -30.25,26.402 U1.39@-30.25,28.7 ; v1(-30.305,15.045) -30.25,14.99 U1.122@-30.25,13.55 ; U1.47@-27.05,28.7 -27.05,27.42 -26.907,27.277 -26.907,27.056 v1(-26.356,26.504) ; U1.113@-26.65,13.55 -26.65,14.775 v1(-26.324,15.101) ; U1.101@-21.85,13.55 -21.85,12.232 v1(-21.695,12.077) ; U1.63@-20.65,28.7 -20.65,29.759 -20.12,30.289 v1(-19.002,30.289) ; U1.90@-18.875,17.325 -17.75,17.325 -17.475,17.6 v1(-17.35,17.6) ; U1.79@-18.875,21.725 -18,21.725 -17.752,21.973 -17.752,21.994 -17.413,22.333 -17.392,22.333 -17.3,22.425 -17.3,22.547 v1(-17.313,22.559) ; U1.69@-18.875,25.725 -17.749,25.725 v1(-17.17,25.146) ; U1.68@-18.875,26.125 -17.565,26.125 v1(-17.145,25.705) ; v1(-6.299,1.651) -5.944,1.651 -5.602,1.309 Rpu.2@-5.602,0.475
  Solder Side w0.4: 1.41@-8.3,40.8 1.80@-8.3,45.2
  Solder Side w0.5: CVref2.1@-40.237,21.284 -38.853,21.284 -37.511,19.943 -37.511,19.029 -37.024,18.541 CVref1.1@-36.604,18.541 -35.857,18.541 v1(-35.571,18.256) ; v2(-33.683,44.843) -33.64,44.8 Rpg.2@-32.824,44.8
  other v1: -10.125,20.964 -8.3,42.354 -8.3,43.167 -8.309,43.802
  other v2: -33.404,37.96 -32.794,37.96 -32.134,37.96 -31.601,38.137 -33.658,38.417 -33.099,38.417 -32.54,38.468 -31.982,38.569 -33.556,38.95 -32.998,38.976 -32.413,39.001 -31.931,39.306 -32.947,39.56 -32.388,39.839
5V: 1.59 1.60 1.61 1.62 Cin.1 U2.1 U2.3 U2.4 | length 5.4
  Solder Side w0.2: U2.1@-31.775,42.525 -31.775,43.45 -32.15,43.825 -32.15,45.8 -31.9,46.05 -30.3,46.05
A0: ?.104 U1.40 | length 16.9
  Component Side w0.2: ?.104@-40.775,37.475 -39.604,37.475 -39.297,37.782 v1(-39.297,38.061)
  Solder Side w0.2: v1(-39.297,38.061) -36.593,38.061 -29.696,31.164 -29.696,30.012 -29.85,29.858 U1.40@-29.85,28.7
A1: ?.105 U1.41 | length 13.1
  Component Side w0.2: ?.105@-37.125,36.205 -35.764,36.205 -34.65,35.091 -34.284,34.725 v1(-31.625,34.725)
  Solder Side w0.2: v1(-31.625,34.725) -29.369,32.469 -29.369,29.877 -29.45,29.795 U1.41@-29.45,28.7
A2: ?.106 U1.50 | length 20.3
  Component Side w0.2: ?.106@-40.775,36.205 -39.549,36.205 -38.906,35.562 -35.956,35.562 -34.54,34.146 -30.179,34.146 v1(-29.75,34.575)
  Solder Side w0.2: v1(-29.75,34.575) -28.425,34.575 -25.85,32 U1.50@-25.85,28.7
A3: ?.107 U1.49 | length 15.4
  Component Side w0.2: ?.107@-37.125,34.935 -36.422,34.935 -35.307,33.819 -29.294,33.819 v1(-29.25,33.775)
  Solder Side w0.2: v1(-29.25,33.775) -28.087,33.775 -26.25,31.938 U1.49@-26.25,28.7
A4: ?.109 U1.75 | length 23.7
  Component Side w0.2: ?.109@-36.835,33.375 ?.109@-37.125,33.665 -35.79,33.665 -35.496,33.371 -35.496,32.812 -33.557,30.874 -32.93,30.874 -32.925,30.869 -32.731,30.869 -32.632,30.771 -32.621,30.771 -29.156,27.306 -29.156,27.3 -27.373,25.517 -24.212,25.517 v1(-23.955,25.26)
  Solder Side w0.2: v1(-23.955,25.26) -23.845,25.26 -23.865,25.28 -22.885,25.28 -22.546,24.941 -22.546,24.296 -22.351,24.101 -22.344,24.101 -21.568,23.325 U1.75@-18.875,23.325
A5: ?.110 U1.76 | length 26.7
  Component Side w0.2: ?.110@-40.775,33.665 -39.065,33.665 -38.438,33.038 -35.972,33.038 -35.823,32.889 -35.823,32.648 -33.722,30.547 -33.065,30.547 -33.061,30.542 -32.866,30.542 -27.513,25.19 -24.704,25.19 -24.195,24.681 -23.716,24.681 -23.695,24.701 v1(-23.124,24.701)
  Solder Side w0.2: v1(-23.124,24.701) -23.124,24.412 -22.487,23.774 -22.479,23.774 -21.757,23.052 -21.757,23.045 -21.637,22.925 U1.76@-18.875,22.925
A6: ?.111 U1.77 | length 22.3
  Component Side w0.2: ?.111@-37.125,32.395 -36.12,32.395 -33.945,30.22 -33.201,30.22 -33.196,30.215 -33.001,30.215 -27.649,24.863 -24.839,24.863 -24.33,24.354 -24.027,24.354 v1(-23.774,24.101)
  Solder Side w0.2: v1(-23.774,24.101) -23.276,24.101 -22.622,23.447 -22.615,23.447 -22.084,22.917 -22.084,22.909 -21.7,22.525 U1.77@-18.875,22.525
A7: ?.112 U1.78 | length 26.2
  Component Side w0.2: ?.112@-40.775,32.395 -38.921,32.395 -38.294,31.768 -35.968,31.768 -34.093,29.893 -33.336,29.893 -33.331,29.888 -33.137,29.888 -27.518,24.269 v1(-25.327,24.269)
  Solder Side w0.2: v1(-25.327,24.269) -24.76,24.269 -24.014,23.523 -23.16,23.523 -22.758,23.12 -22.75,23.12 -22.411,22.781 -22.411,22.774 -21.762,22.125 U1.78@-18.875,22.125
A8: ?.113 U1.81 | length 22.9
  Component Side w0.2: ?.113@-36.825,30.825 ?.113@-37.125,31.125 -35.787,31.125 -34.228,29.566 -33.472,29.566 -33.467,29.561 -33.272,29.561 -26.342,22.631 -25.315,22.631 v1(-24.311,21.627)
  Solder Side w0.2: v1(-24.311,21.627) -23.608,20.925 U1.81@-18.875,20.925
A9: ?.115 U1.82 | length 22.1
  Component Side w0.2: ?.115@-37.125,29.855 -34.98,29.855 -34.364,29.239 -33.607,29.239 -33.602,29.234 -33.408,29.234 -26.478,22.304 -25.826,22.304 v1(-25.124,21.602)
  Solder Side w0.2: v1(-25.124,21.602) -24.047,20.525 U1.82@-18.875,20.525
A10: ?.116 U1.83 | length 25.9
  Component Side w0.2: ?.116@-40.775,29.855 -38.921,29.855 -38.278,29.212 -34.799,29.212 -34.499,28.912 -33.742,28.912 -33.738,28.907 -33.543,28.907 -26.613,21.977 -26.337,21.977 v1(-25.936,21.577)
  Solder Side w0.2: v1(-25.936,21.577) -24.485,20.125 U1.83@-18.875,20.125
A11: ?.117 U1.84 | length 22.1
  Component Side w0.2: ?.117@-37.125,28.585 -33.878,28.585 -33.873,28.58 -33.679,28.58 -27.243,22.145 -27.243,21.893 v1(-26.749,21.399)
  Solder Side w0.2: v1(-26.749,21.399) -25.075,19.725 U1.84@-18.875,19.725
A12: ?.119 U1.5 | length 15.6
  Component Side w0.2: v1(-38.975,19.45) -38.56,19.865 -38.56,27.063 -38.308,27.315 ?.119@-37.125,27.315
  Solder Side w0.2: v1(-38.975,19.45) -38.975,19.279 -36.221,16.525 U1.5@-34.025,16.525
A13: ?.120 U1.6 | length 15.3
  Component Side w0.2: ?.120@-40.775,27.315 -39.385,27.315 -39.385,27.304 -39.221,27.139 v1(-39.221,20.357)
  Solder Side w0.2: v1(-39.221,20.357) -39.064,20.357 -38.396,19.69 -38.396,19.178 -36.14,16.921 -35.185,16.921 -35.182,16.925 U1.6@-34.025,16.925
A_1CEN: ?.30 C5.1 T2.3 | length 21.8
  Component Side w0.2: ?.30@-13.775,19.694 -12.497,19.694 -12.144,19.341 v1(-12.144,18.529)
  Solder Side w0.2: C5.1@-12.119,19.202 -12.119,18.395 -12.144,18.42 v1(-12.144,18.529) -12.144,18.369 -5.55,11.775 -5.55,9.013 -1.973,5.436 T2.3@-1.973,4.525
A_1N: ?.31 T2.2 | length 20.5
  Component Side w0.2: ?.31@-10.125,18.424 -8.865,18.424 -7.175,16.734 -7.175,11.15 -4.927,8.902 v1(-4.575,8.902)
  Solder Side w0.2: v1(-4.575,8.902) -4.398,8.725 -1.95,8.725 0.027,6.748 T2.2@0.027,4.525
A_1P: ?.29 T2.1 | length 22.9
  Component Side w0.2: ?.29@-10.125,19.694 -10.125,19.176 -10,19.051 -8.956,19.051 -6.15,16.245 -6.15,11.175 v1(-4.7,9.725)
  Solder Side w0.2: v1(-4.7,9.725) -4.571,9.596 -0.946,9.596 2.027,6.623 T2.1@2.027,4.525
A_2CEN: ?.34 C6.1 T2.4 | length 17.7
  Component Side w0.2: ?.34@-13.775,17.154 -12.7,17.154 -12.22,16.674 v1(-12.119,16.674)
  Solder Side w0.2: v1(-12.119,16.674) -12.144,16.649 C6.1@-12.144,15.874 -11.624,15.874 -6.025,10.276 -6.025,7.71 -3.973,5.658 T2.4@-3.973,4.525
A_2N: ?.35 T2.6 | length 13
  Component Side w0.2: ?.35@-10.125,15.884 -8.865,15.884 -7.973,14.992 v1(-7.973,6.052)
  Solder Side w0.2: T2.6@-7.973,4.525 v1(-7.973,6.052)
A_2P: ?.33 T2.5 | length 15.1
  Component Side w0.2: ?.33@-10.125,17.154 -8.89,17.154 -7.625,15.889 -7.625,7.761 v1(-5.947,6.083)
  Solder Side w0.2: T2.5@-5.973,4.525 -5.973,6.056 v1(-5.947,6.083)
B_1CEN: ?.4 C1.1 T1.3 | length 18.5
  Component Side w0.2: ?.4@-13.775,36.204 -12.096,36.204 v1(-12.068,36.232)
  Solder Side w0.2: v1(-12.068,36.232) -11.928,36.093 C1.1@-11.052,36.093 -10.43,36.093 -10.061,35.724 -10.061,33.818 -1.925,25.682 T1.3@-1.925,24.509
B_1N: ?.5 T1.2 | length 15.8
  Component Side w0.2: ?.5@-10.125,34.934 -9.45,34.934 -8.823,34.307 -8.823,33.698 -3.475,28.35 v1(-3.475,28.05)
  Solder Side w0.2: v1(-3.475,28.05) -2.209,28.05 0.075,25.766 T1.2@0.075,24.509
B_1P: ?.3 T1.1 | length 18.7
  Component Side w0.2: ?.3@-10.125,36.204 -8.789,36.204 -8.175,35.591 -8.175,33.875 v1(-3.375,29.075)
  Solder Side w0.2: v1(-3.375,29.075) -1.304,29.075 2.075,25.696 T1.1@2.075,24.509
B_2CEN: ?.8 C2.1 T1.4 | length 14.8
  Component Side w0.2: ?.8@-13.775,33.664 -12.396,33.664 v1(-12.17,33.438)
  Solder Side w0.2: v1(-12.17,33.438) -11.725,32.994 C2.1@-11.027,32.994 -10.413,32.994 -3.925,26.506 T1.4@-3.925,24.509
B_2N: ?.9 T1.6 | length 9.6
  Component Side w0.254: ?.9@-10.125,32.394 -8.763,32.394 -7.902,31.533 v1(-7.902,26.225)
  Solder Side w0.2: T1.6@-7.925,24.509 -7.925,26.202 v1(-7.902,26.225)
B_2P: ?.7 T1.5 | length 11.5
  Component Side w0.2: ?.7@-10.125,33.664 -9.389,33.664 -5.948,30.223 -5.95,30.222 -5.947,30.218 v1(-5.947,25.996)
  Solder Side w0.2: T1.5@-5.947,24.593 -5.956,24.584 -6,24.584 -5.97,24.554 T1.5@-5.925,24.509 -5.925,25.975 v1(-5.947,25.996)
D0: ?.131 U1.18 | length 4.6
  Component Side w0.2: ?.131@-37.125,19.695 -37.125,20.275 -37.062,20.338 -35.956,20.338 -35.436,20.858 v1(-35.436,20.967)
  Solder Side w0.2: v1(-35.436,20.967) -35.436,21.45 -35.161,21.725 U1.18@-34.025,21.725
D1: ?.129 U1.19 | length 3.6
  Solder Side w0.2: v1(-37.189,21.018) -36.77,21.018 -35.663,22.125 U1.19@-34.025,22.125
D2: ?.127 U1.20 | length 2.7
  Solder Side w0.2: v1(-36.65,22.25) -36,22.25 -35.725,22.525 U1.20@-34.025,22.525
D3: ?.126 U1.21 | length 10.4
  Component Side w0.2: v1(-42.472,23.507) -42.47,23.505 ?.126@-40.775,23.505
  Solder Side w0.2: v1(-42.472,23.507) -38.027,23.507 -37.419,22.899 -36.874,22.899 -36.848,22.925 U1.21@-34.025,22.925
D4: ?.125 U1.22 | length 3.2
  Solder Side w0.2: v1(-37.125,23.505) -35.784,23.505 -35.604,23.325 U1.22@-34.025,23.325
D5: ?.123 U1.23 | length 3
  Solder Side w0.2: v1(-36.55,24.776) -36.476,24.776 -35.425,23.725 U1.23@-34.025,23.725
D6: ?.122 U1.24 | length 10.9
  Component Side w0.2: v1(-42.421,25.971) -42.347,26.045 ?.122@-40.775,26.045
  Solder Side w0.2: v1(-42.421,25.971) -41.832,25.382 -36.299,25.382 -35.944,25.027 -35.944,24.88 -35.189,24.125 U1.24@-34.025,24.125
D7: ?.121 U1.25 | length 3.9
  Solder Side w0.2: v1(-37.125,26.125) -36.4,26.125 -35.55,25.275 -35.55,25.025 -35.05,24.525 U1.25@-34.025,24.525
GND: 1.42 1.43 1.78 1.79 ?.2 ?.6 ?.10 ?.14 ?.18 ?.28 ?.32 ?.36 ?.40 ?.44 ?.52 ?.102 ?.108 ?.114 ?.118 ?.124 ?.128 ?.134 ?.140 ?.144 ?.150 ?.156 B1.1 C1.2 C2.2 C5.2 C6.2 C21.2 C44.1 C55.1 C66.1 Cin.2 Cldo.2 Cout.2 CV1.2 CV2.2 CV3.2 CV4.2 CV5.2 CV6.2 CV7.2 CV8.2 CV9.2 CV10.2 CV11.2 CV12.2 CV13.2 CVref1.2 CVref2.2 Cx1.2 Cx2.2 DL1.1 DL1.3 DL2.1 DL2.3 DL3.1 DL3.3 DL4.1 DL4.3 DLp.K J2.2 J2.3 J2.5 R21.1 R33.1 R34.1 R35.1 R55.2 R66.2 R77.2 U1.10 U1.17 U1.48 U1.64 U1.80 U1.88 U1.114 U2.5 U2.6 U2.9 X1.2 X1.4 | length 131.6
  Component Side w0.2: v1(-42.472,4.457) -42.47,4.455 ?.156@-40.775,4.455 ; C44.1@-36.535,-2.932 -36.535,-3.588 -36.427,-3.696 v1(-35.944,-3.696) -35.436,-3.696 -35.35,-3.61 R55.2@-35.35,-2.932 ; v1(-24.971,26.58) -24.971,26.517 CV8.2@-24.959,26.504 ; v1(-21.669,9.029) CV2.2@-21.669,9.893 ; Cldo.2@-21.666,21.222 -20.703,21.222 v1(-20.399,21.526) -20.006,21.132 CV4.2@-19.18,21.132 ; CV6.2@-18.901,27.787 -18.437,27.787 -17.986,28.238 v1(-17.986,28.384) ; CV5.2@-18.875,23.826 -17.591,23.826 v1(-17.438,23.98) ; v1(-15.7,6.184) -15.24,5.724 ?.52@-13.775,5.724 ; v1(-15.497,10.807) -15.494,10.804 ?.44@-13.775,10.804 ; v1(-15.472,15.887) -15.469,15.884 ?.36@-13.775,15.884 ; v1(-15.443,18.034) -15.053,18.424 ?.32@-13.775,18.424 ; ?.40@-13.775,13.344 -12.7,13.344 -12.697,13.347 v1(-12.195,13.347) ; ?.28@-13.775,20.964 -12.68,20.964 v1(-12.119,21.526) ; ?.18@-13.775,27.314 v1(-12.322,27.314) ; ?.14@-13.775,29.854 -14.45,29.854 -15.392,30.797 v1(-15.392,31.394) -15.392,31.871 -14.869,32.394 ?.10@-13.775,32.394 ; ?.6@-13.775,34.934 -12.116,34.934 v1(-12.017,34.835) ; ?.2@-13.775,37.474 v1@-12.294,37.474 ; J2.2@-12.802,-2.231 -12.802,-0.914 -12.37,-0.483 v1(-11.582,-0.483) ; J2.3@-11.532,-2.231 -11.532,-0.533 v1(-11.582,-0.483) ; J2.5@-8.992,-2.231 -8.992,-0.838 -9.347,-0.483 v1(-11.582,-0.483)
  Component Side w0.254: CV10.2@-35.182,22.326 CV11.2@-33.785,22.326 -33.112,22.326 v1(-32.439,21.653) -32.172,21.919 CV12.2@-31.27,21.919 ; v1(-31.677,22.897) -31.563,23.012 CV9.2@-30.635,23.012 ; CV13.2@-29.962,17.411 CV13.2@-29.937,17.436
  Component Side w0.5: v1(-42.472,24.777) -42.47,24.775 ?.124@-40.775,24.775 ; v1(-42.446,34.937) -42.444,34.935 ?.108@-40.775,34.935 ; v1(-42.421,22.237) -42.419,22.235 ?.128@-40.775,22.235 ; v1(-42.37,18.427) -42.368,18.425 ?.134@-40.775,18.425 ; v1(-42.345,28.587) -42.343,28.585 ?.118@-40.775,28.585 ; v1(-42.345,31.127) -42.343,31.125 ?.114@-40.775,31.125 ; ?.150@-40.775,8.265 -39.35,8.265 -38.89,8.724 v1(-38.89,10.807) -38.89,11.671 -39.295,12.075 ?.144@-40.775,12.075 ; ?.140@-40.775,14.615 -39.7,14.615 -39.221,15.094 v1(-39.221,15.252) ; ?.102@-40.775,38.745 -40.775,39.145 -40.77,39.15 v1(-40.77,39.712) ; C55.1@-34.993,43.015 -34.343,43.015 -34.166,43.192 v1(-34.166,43.725) -34.166,44.016 -34.511,44.36 R66.2@-34.994,44.36 ; v2(-30.8,41.225) -30.353,41.672 DLp.K@-30.353,42.748 ; R77.2@-5.349,44.35 -5.957,44.35 -6.353,44.746 -6.353,45.046 -5.963,45.436 C66.1@-5.349,45.436 ; DL3.1@-4.7,20.15 -3.6,20.15 -3.429,19.979 -3.429,19.329 -2.8,18.7 DL3.3@-1.9,18.7 ; DL4.1@-4.7,23.5 -3.704,23.5 -3.3,23.096 v1(-3.3,22.775) -3.3,22.486 -2.864,22.05 DL4.3@-1.9,22.05 ; B1.1@-4.511,1.295 v1(-4.42,1.295)
  Solder Side w0.2: CVref1.2@-36.604,19.938 -35.537,19.938 v1(-35.379,20.097) -35.379,18.881 -35.022,18.525 U1.10@-34.025,18.525 ; U1.17@-34.025,21.325 -32.775,21.325 -32.447,21.653 v1(-32.439,21.653) ; U1.114@-27.05,13.55 -27.05,15.438 -26.453,16.035 -26.292,16.035 v1(-26.292,16.116) ; U1.48@-26.65,28.7 -26.65,27.675 -25.555,26.58 v1(-24.971,26.58) ; v1(-20.399,21.526) -20.198,21.325 U1.80@-18.875,21.325 ; U1.64@-20.25,28.7 -19.25,28.7 v1(-19.025,28.925) ; U1.88@-18.875,18.125 -17.875,18.125 v1(-17.375,18.625) ; X1.4@-15.926,25.756 -15.926,24.917 -15.786,24.778 Cx1.2@-15.786,24.257 -15.786,23.876 -15.608,23.698 v1(-15.418,23.698) ; v1(-15.392,31.394) -14.465,30.467 Cx2.2@-14.465,29.413 -14.465,28.918 -14.326,28.778 X1.2@-14.326,27.956 ; v1(-12.271,37.452) -12.233,37.49 C1.2@-11.052,37.49 ; v1(-12.195,13.347) -12.144,13.398 C6.2@-12.144,14.477 ; C5.2@-12.119,20.599 v1(-12.119,21.526) ; v1(-12.017,34.835) -12.017,34.607 -11.801,34.391 C2.2@-11.027,34.391 ; v1(-6.299,-0.279) -5.918,-0.279 -5.602,-0.596 C21.2@-5.602,-1.25
  Solder Side w0.254: 1.43@-9.9,40.8 -9.9,42.4 v1(-9.95,42.45) -9.9,42.5 1.78@-9.9,45.2 ; 1.42@-9.1,40.8 1.79@-9.1,45.2
  Solder Side w0.5: R33.1@-41.481,21.005 -42.358,21.005 -42.421,21.069 v1(-42.421,22.237) -41.977,22.681 CVref2.2@-40.237,22.681 ; R34.1@-41.405,15.798 R35.1@-40.16,15.798 -39.513,15.798 -39.221,15.506 v1(-39.221,15.252) ; DL1.3@-39.95,12.151 -39.95,11.181 -39.576,10.807 v1(-38.89,10.807) -38.5,10.417 DL1.1@-38.5,9.351 ; DL2.1@-39.875,32.15 -39.875,31.725 v1(-38.8,30.65) -38.425,30.275 DL2.3@-38.425,29.35
  other v1: -29.569,17.436 -3.425,19.975 -9.1,42.938 -6.353,44.894
  other v2: -29.35,38.475 -28.35,38.8 -29.025,39.275 -27.75,39.35 -28.6,39.775 -28.832,40.576 -30.325,41.175 -32.375,41.2 -31.225,41.2
Net_19: ?.19 R11.2 | length 6.6
  Component Side w0.2: ?.19@-10.125,26.044 -8.96,26.044 -6.85,23.934 -6.85,22.121 -7.046,21.925 R11.2@-7.374,21.925
Net_20: ?.20 R12.2 | length 7.9
  Component Side w0.2: ?.20@-13.775,26.044 -12.394,26.044 -11.767,25.417 -8.867,25.417 -7.549,24.098 R12.2@-7.549,23.55 ; R12.2@-7.549,23.4 R12.2@-7.549,23.55 ; R12.2@-7.399,23.4 R12.2@-7.549,23.55
Net_21: ?.21 R13.2 | length 8.8
  Component Side w0.2: ?.21@-10.125,24.774 -8.949,24.774 -8.225,24.05 -8.225,21.5 -7.6,20.875 -7.05,20.875 -6.825,20.65 -6.825,19.198 -6.998,19.025 R13.2@-7.574,19.025
Net_22: ?.22 R14.2 | length 9.7
  Component Side w0.2: ?.22@-13.775,24.774 -12.474,24.774 -11.847,24.147 -8.897,24.147 -8.625,23.875 -8.625,21.277 R14.2@-7.499,20.15